# Altium PCB H01R0.PcbDoc (part 2 of 2)
Units mil, origin at the board's own origin, x right, y up, seen from the top; angles counter-clockwise.
Board outline 1363.78 x 1181.1 mil, 2 copper layers (Top Layer, Bottom Layer); 43 components, 31 nets, 122 pads, 0 vias.
Unrouted connection lines stored in the file: 69.
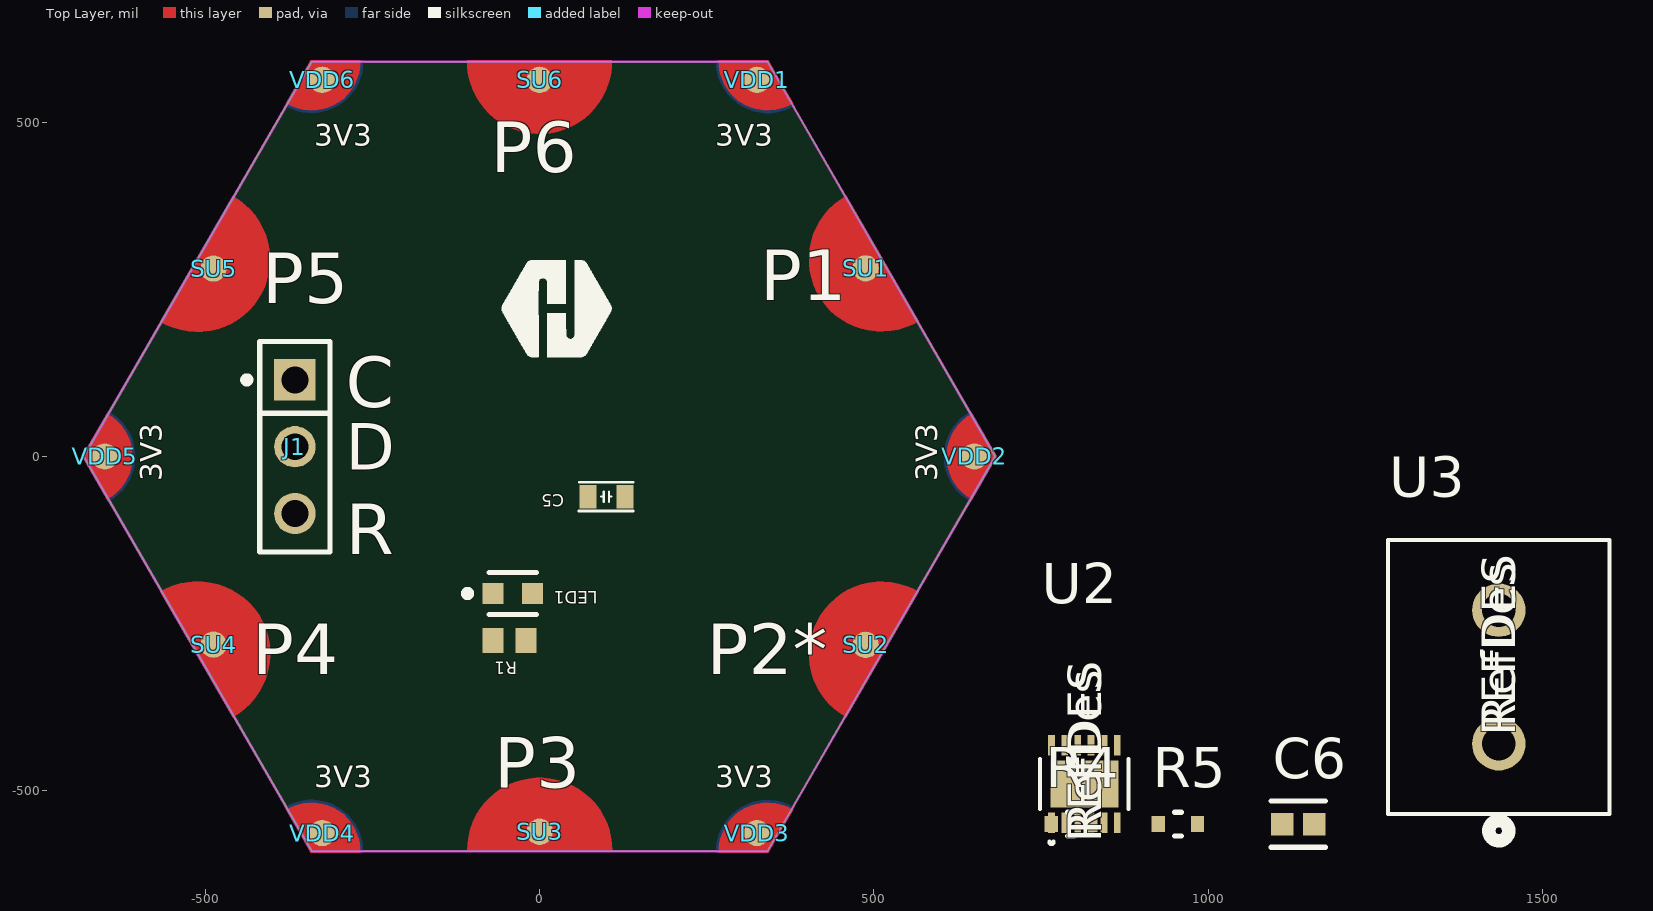
[diagram p0: Top Layer view]

## Nets (pads, with @x,y where several pads share a name; then routed paths per layer and width w, separated by ;. In a path a pad name is that pad's centre, name@x,y a point inside that pad or via, vN(x,y) a via of type N, cw(c..) or ccw(c..) an arc to the next point about the centre after c; other vN are vias at no path point) (continued)
pads on no net: U1.1 U1.2 U1.3 U1.17 U1.20 U1.22 U1.24 U1.25 U1.26 U1.27 U1.28 U1.30 U1.31 U1.33 U1.34 U1.37 U1.38 U1.40 U1.43 U1.44 U1.45 U1.46

## Keep-outs
Keep-Out Layer:
  the board outline again, w3.94

## Silkscreen, mask and mechanical layers (free items; w line width, h text height)
Top Overlay:
  drawing of 1337 lines, arcs and shapes, not listed
  text "3V3" at -337,465.01 h32
  text "3V3" at 263,465.01 h32
  text "P6" at -73.11,425.36 h76
  text "P1" at 330,234.02 h76
  text "P5" at -415.23,229.56 h76
  text "C" at -290,74.02 h76
  text "D" at -290,-19.99 h70
  text "3V3" at -565.01,-37 h32 r90
  text "3V3" at 594.99,-37 h32 r90
  text "R" at -290,-145.98 h76
  text "P4" at -430,-325.98 h76
  text "P2*" at 250,-325.98 h76
  text "3V3" at -337,-494.99 h32
  text "P3" at -68.14,-495.44 h76
  text "3V3" at 263,-494.99 h32
Bottom Overlay:
  text "GND" at 257,525.01 h32
  text "GND" at -253.7,455.18 h32
  text "P6" at 66.89,425.36 h76
  text "P5" at -310,234.02 h76
  text "P1" at 410,234.02 h76
  text "H01R00" at 490,190 h70 r90
  text "GND" at -565.01,57 h32 r90
  text "GND" at 594.99,37 h32 r90
  text "P4" at -270,-325.98 h76
  text "P2*" at 390,-325.98 h76
  text "GND" at -337,-465.01 h32 r180
  text "GND" at 263,-465.01 h32 r180
  text "P3" at 71.86,-495.44 h76
Top Solder:
  drawing of 20 lines, arcs and shapes, not listed
Dimensions:
  the board outline again, w3.94

## Text inside footprints (layer, text, board x,y; h text height)
C2: Mechanical 32 "2" at 266.5,180 h25 r180; Mechanical 32 "1" at 193.5,180 h25 r180; Mechanical 33 "C40" at 313.5,187.17 h25 r180
C4: Mechanical 32 "1" at 286.5,265 h25; Mechanical 32 "2" at 213.5,265 h25; Mechanical 33 "C40" at 166.5,257.83 h25
U2: Top Overlay "REFDES" at 840,-577.5 h50 r90; Top Overlay "RefDes" at 840,-565 h50 r90; Mechanical 13 "RefDes2" at 840,-577.5 h50 r90
U3: Top Overlay "REFDES" at 1460,-417.5 h50 r90; Top Overlay "RefDes" at 1460,-405 h50 r90; Mechanical 13 "RefDes2" at 1460,-417.5 h50 r90